# Altium PCB Amplifier.PcbDoc
Units mil, origin at the board's own origin, x right, y up, seen from the top; angles counter-clockwise.
Board outline 6000 x 4000 mil, 2 copper layers (Top Layer, Bottom Layer); 148 components, 104 nets, 411 pads, 72 vias.
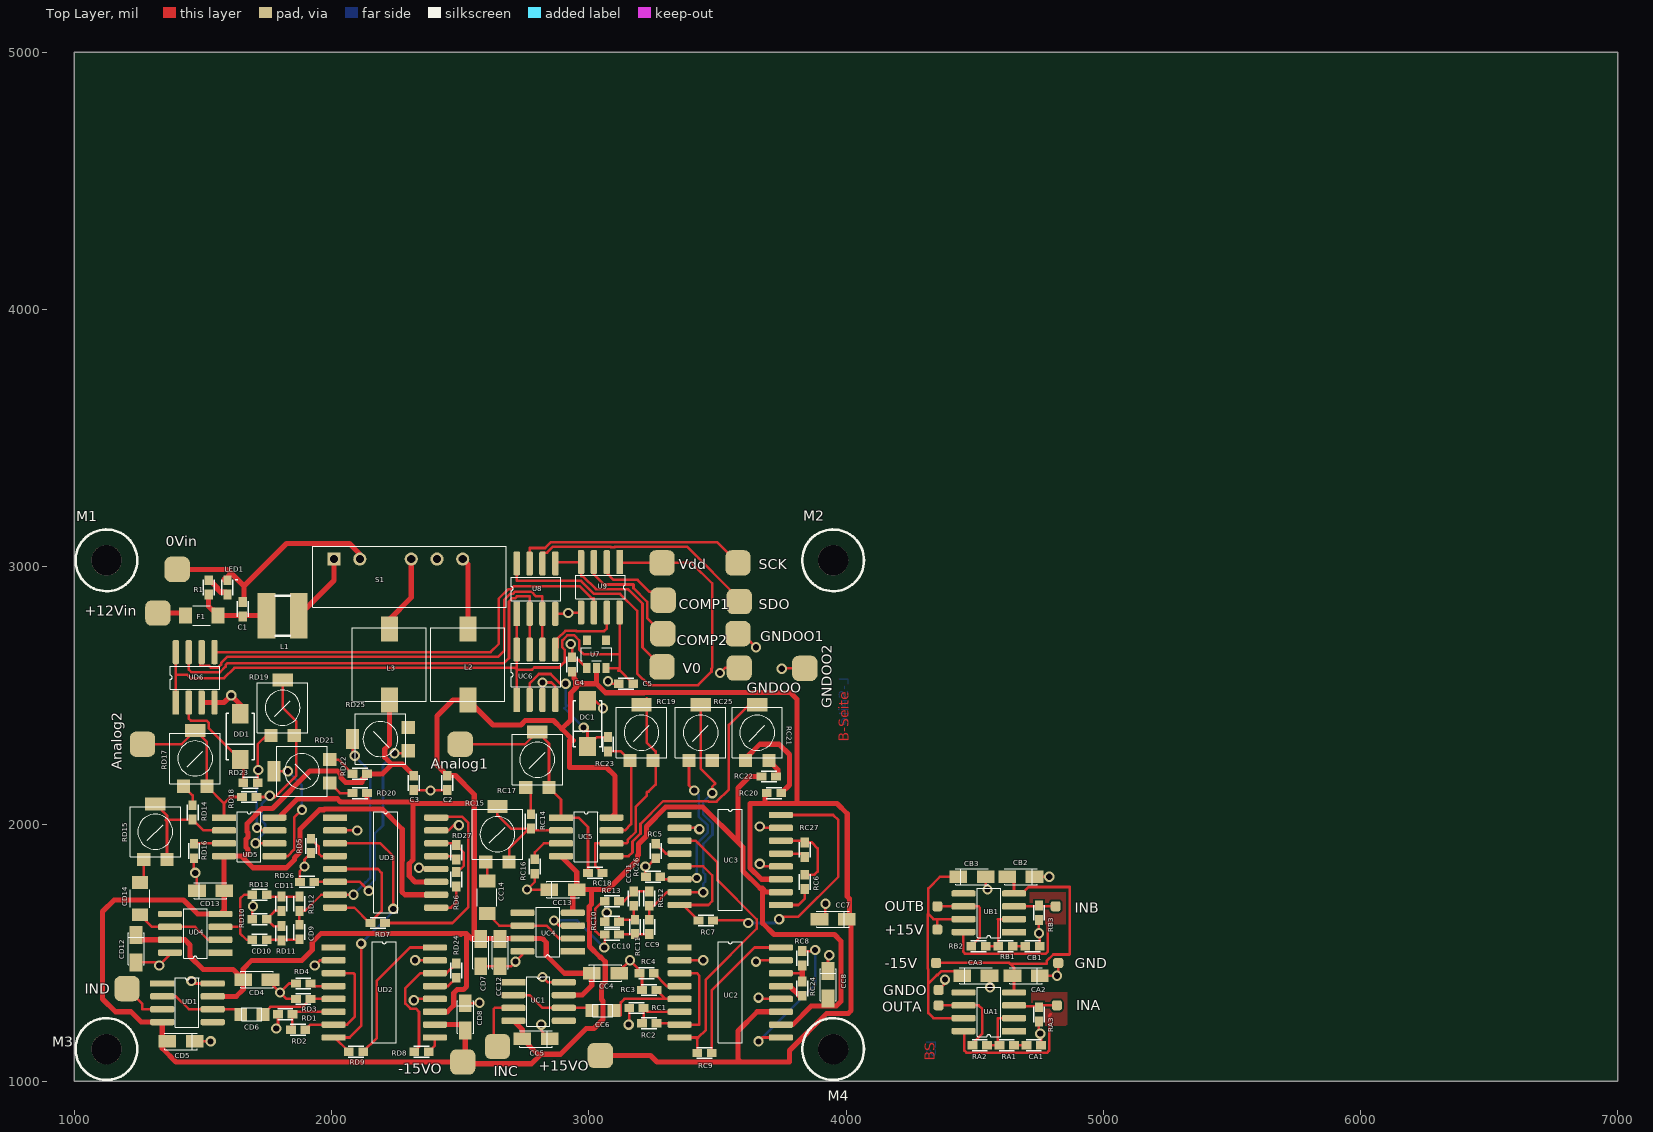
[diagram p0: Top Layer view]
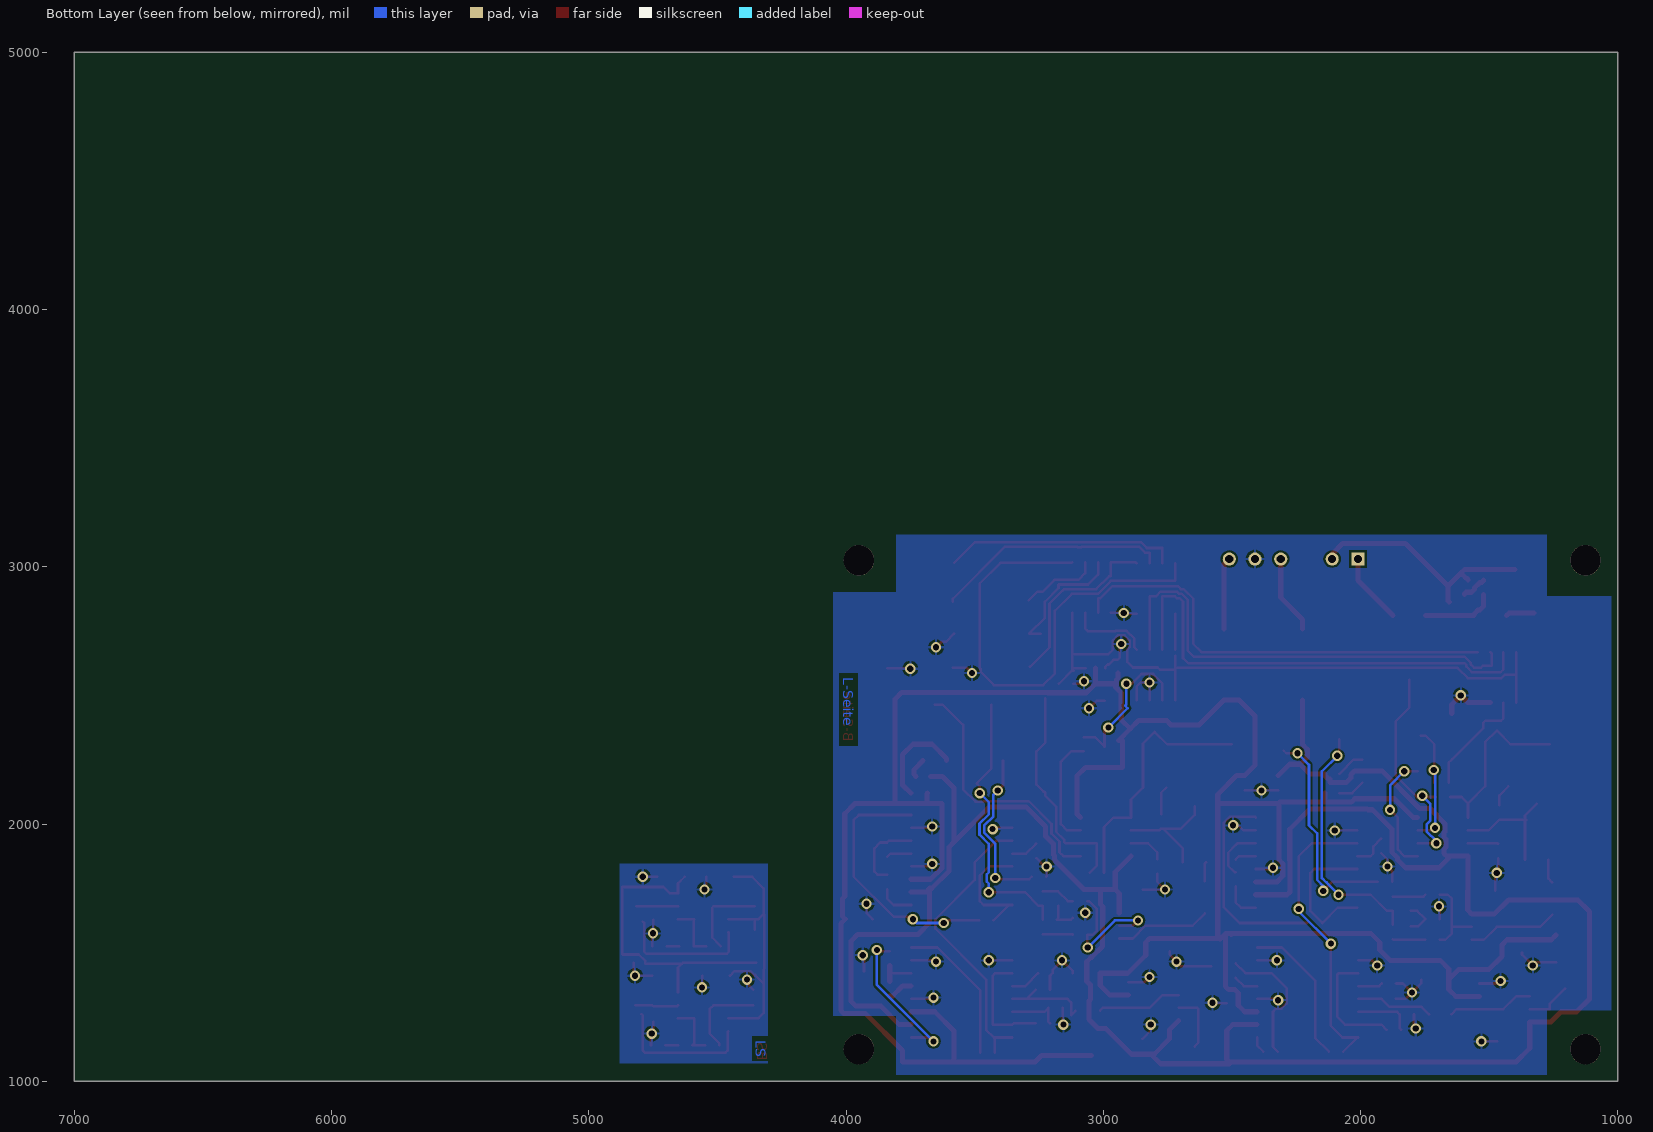
[diagram p1: Bottom Layer view, seen from below]

## Layer stack, top to bottom
Top Solder: solder mask 0.4, Solder Resist, Dk 3.5
Top Layer: signal copper 1.4
Dielectric 1: dielectric 12.6, FR-4, Dk 4.8
Bottom Layer: signal copper 1.4
Bottom Solder: solder mask 0.4, Solder Resist, Dk 3.5

## Board outline
1000,1000 7000,1000 7000,5000 1000,5000

## Design rules (kind name [scope] priority, off if disabled: settings)
Clearance [All] p1: gap=8 ignorepadtopadclearanceinfootprint=FALSE except(0: Arc-Hole Track-Hole SMDPad-Hole THPad-Hole Via-Hole Fill-Hole Poly-Hole Region-Hole Text-Hole)
HoleSize [All] p1: absolutevalues=TRUE maxlimit=500 minlimit=1 maxpercent=80.000 minpercent=20.000
MinimumSolderMaskSliver [All] p1 off: minsoldermaskwidth=10
PolygonConnect [All] p1: connectstyle=Relief reliefconductorwidth=10 reliefentries=4 polygonreliefangle="90 Angle" airgapwidth=10
RoutingVias [All] p1: holewidth=24 width=40 viastyle="Through Hole" minholewidth=24 minwidth=40 maxholewidth=28 maxwidth=50
SilkToSilkClearance [All] p1 off: silktosilkclearance=10
SilkToSolderMaskClearance [IsPad] p1 off: minsilkscreentomaskgap=10 clearancetoexposedcopper=TRUE
SolderMaskExpansion [All] p1: expansion=4
Width [All] p1: maxlimit=20 minlimit=10 preferedwidth=10
26 further rules are at their usual default settings.

## Components (designator, comment, footprint, x,y, rotation, side; value= is the part's Value field where it differs from the comment)
0Vin "SIP" PAD2,2x2,5 1400,2990 r90 top
+12Vin "SIP" PAD2,2x2,5 1325,2820 r90 top
+15V "SIP" PAD1X1 4355,1590 r180 top
+15VO "SIP" PAD2,2x2,5 3045,1100 r90 top
-15V "SIP" PAD1X1 4350,1460 r270 top
-15VO "SIP" PAD2,2x2,5 2510,1075 r90 top
Analog1 "SIP" PAD2,2x2,5 2500,2310 r90 top
Analog2 "SIP" PAD2,2x2,5 1265,2310 r270 top
C1 "1u0" 0603 1655,2835 r270 top
C2 "1u0" 0603 2450,2160 r90 top
C3 "1u0" 0603 2320,2160 r270 top
C4 "100n" 0603 2935,2620 r270 top
C5 "1u0" 0603 3145,2545 r0 top
CA1 "u47" 0603 4730,1140 r180 top
CA2 "TA2u2/25" TA_SMD-A 4700,1410 r180 top
CA3 "TA2u2/25" TA_SMD-A 4505,1410 r0 top
CB1 "u47" 0603 4725,1525 r180 top
CB2 "TA2u2/25" TA_SMD-A 4680,1795 r180 top
CB3 "TA2u2/25" TA_SMD-A 4490,1795 r0 top
CC4 "TA2u2/25" TA_SMD-A 3065,1420 r0 top
CC5 "TA2u2/25" TA_SMD-A 2795,1165 r180 top
CC6 "u82" C0805 3055,1275 r0 top
CC7 "TA2u2/25" TA_SMD-A 3950,1630 r180 top
CC8 "TA2u2/25" TA_SMD-A 3930,1375 r270 top
CC9 "500p" 0603 3235,1600 r270 top
CC10 "500p" 0603 3090,1570 r180 top
CC11 "1n" 0603 3175,1710 r90 top
CC12 "TA2u2/25" TA_SMD-A 2655,1500 r270 top
CC13 "TA2u2/25" TA_SMD-A 2900,1745 r0 top
CC14 "3u3/50V" 1206 2605,1715 r90 top
CD4 "TA2u2/25" TA_SMD-A 1710,1395 r0 top
CD5 "TA2u2/25" TA_SMD-A 1415,1155 r180 top
CD6 "u82" C0805 1690,1260 r0 top
CD7 "TA2u2/25" TA_SMD-A 2580,1500 r270 top
CD8 "TA2u2/25" TA_SMD-A 2520,1250 r270 top
CD9 "500p" 0603 1875,1580 r270 top
CD10 "500p" 0603 1720,1550 r180 top
CD11 "1n" 0603 1805,1690 r90 top
CD12 "TA2u2/25" TA_SMD-A 1240,1515 r270 top
CD13 "TA2u2/25" TA_SMD-A 1530,1740 r0 top
CD14 "3u3/50V" 1206 1255,1710 r90 top
COMP1 "SIP" PAD2,2x2,5 3289.16,2870 r90 top
COMP2 "SIP" PAD2,2x2,5 3288,2740 r90 top
DC1 "SMAJ5.0A" "SMA (DO214AC)" 2995,2390 r270 top
DD1 "SMAJ5.0A" "SMA (DO214AC)" 1645,2340 r270 top
F1 "PTCSI 0,1-1206" 1206 1495,2810 r0 top
GND "SIP" PAD1X1 4825,1460 r180 top
GNDO "SIP" PAD1X1 4360,1355 r180 top
GNDOO "SIP" PAD2,2x2,5 3585,2606.67 r90 top
GNDOO1 "SIP" PAD2,2x2,5 3580,2740 r90 top
GNDOO2 "SIP" PAD2,2x2,5 3840,2605 r90 top
INA "SIP" PAD1X1 4820,1295 r180 top
INB "SIP" PAD1X1 4815,1680 r180 top
INC "SIP" PAD2,2x2,5 2645,1135 r90 top
IND "SIP" PAD2,2x2,5 1205,1360 r90 top
L1 "744773147" WE-4045 1810,2810 r270 top
L2 "744778233" "WE-PD S/M/XS" 2530,2620 r0 top
L3 "744778233" "WE-PD S/M/XS" 2225,2620 r0 top
LED1 "LED 0603 gn" 0603-Diode 1595.17,2920 r270 top
M1 "MThole" MTHoleM3 1125,3025 r0 top value=Loch
M2 "MThole" MTHoleM3 3950,3025 r0 top value=Loch
M3 "MThole" MTHoleM3 1125,1125 r0 top value=Loch
M4 "MThole" MTHoleM3 3950,1125 r0 top value=Loch
OUTA "SIP" PAD1X1 4360,1295 r180 top
OUTB "SIP" PAD1X1 4355,1680 r180 top
R1 "2k0" 0603 1522.37,2920 r270 top
RA1 "2k0" 0603 4625,1140 r180 top
RA2 "18k" 0603 4520,1140 r180 top
RA3 "100M" 0603 4750,1260 r90 top
RB1 "2k0" 0603 4620,1525 r180 top
RB2 "18k" 0603 4515,1525 r180 top
RB3 "100M" 0603 4750,1655 r90 top
RC1 "4k7" 0603 3185,1285 r0 top
RC2 "18k" 0603 3235,1225 r180 top
RC3 "100k" 0603 3235,1355 r0 top
RC4 "82l" 0603 3225,1420 r0 top
RC5 "82k" 0603 3260,1895 r90 top
RC6 "160k" 0603 3840,1775 r90 top
RC7 "160k" 0603 3455,1625 r0 top
RC8 "6k2" 0603 3830,1478 r270 top
RC9 "6k2" 0603 3450,1110 r0 top
RC10 "10" 0603 3090,1620 r0 top
RC11 "3.16M" 0603 3180,1600 r90 top
RC12 "6.37M" 0603 3235,1710 r270 top
RC13 "6.37M" 0603 3090,1700 r0 top
RC14 "100" 0603 2775,2010 r270 top
RC15 "TS53YL-2k" TS53YL 2645,1960 r0 top
RC16 "10k" 0603 2790,1835 r90 top
RC17 "TS53YL-50k" TS53YL 2800,2250 r0 top
RC18 "10k" 0603 3025,1810 r0 top
RC19 "TS53YL-5k" TS53YL 3205,2355 r0 top
RC20 "3k9" 0603 3720,2120 r0 top
RC21 "TS53YL-1k" TS53YL 3655,2355 r0 top
RC22 "4k7" 0603 3700,2185 r180 top
RC23 "10k" 0603 3075,2310 r90 top
RC24 "5k6" 0603 3830,1360 r270 top
RC25 "TS53YL-22k" TS53YL 3435,2355 r0 top
RC26 "2k2" 0603 3250,1795 r0 top
RC27 "5k6" 0603 3840,1900 r270 top
RD1 "4k7" 0603 1820,1260 r0 top
RD2 "18k" 0603 1870,1200 r180 top
RD3 "100k" 0603 1890,1320 r0 top
RD4 "82k" 0603 1890,1380 r0 top
RD5 "82k" 0603 1920,1915 r90 top
RD6 "160k" 0603 2485,1785 r90 top
RD7 "160k" 0603 2180,1615 r0 top
RD8 "6k2" 0603 2350,1115 r180 top
RD9 "6k2" 0603 2095,1115 r0 top
RD10 "10" 0603 1720,1630 r0 top
RD11 "3.16M" 0603 1805,1575 r90 top
RD12 "6.37M" 0603 1875,1690 r270 top
RD13 "6.37M" 0603 1720,1725 r0 top
RD14 "100" 0603 1460,2045 r270 top
RD15 "TS53YL-2k" TS53YL 1315,1970 r0 top
RD16 "10k" 0603 1465,1895 r90 top
RD17 "TS53YL-50k" TS53YL 1470,2255 r0 top
RD18 "10k" 0603 1680,2105 r0 top
RD19 "TS53YL-5k" TS53YL 1810,2452.01 r0 top
RD20 "3k9" 0603 2110,2120 r180 top
RD21 "TS53YL-1k" TS53YL 1885,2205 r90 top
RD22 "4k7" 0603 2110,2195 r0 top
RD23 "10k" 0603 1685,2160 r180 top
RD24 "5k6" 0603 2485,1430 r270 top
RD25 "TS53YL-22k" TS53YL 2190,2330 r90 top
RD26 "2k2" 0603 1905,1775 r0 top
RD27 "5k6" 0603 2485,1890 r270 top
S1 "DC/DC-Wandler" "DC/DC 2W Dual" 2010,3030 r0 top value=SW2-
SCK "SIP" PAD2,2x2,5 3580,3015 r90 top
SDO "SIP" PAD2,2x2,5 3585,2865 r90 top
U7 "TLV70450" SOT23/5 3030,2660 r0 top
U8 "ADuM1201CRZ" SO8 2795,2915 r0 top
U9 "ADuM1200CRZ" SO8 3045,2920 r180 top
UA1 "OPA124U" SO8 4555,1270 r90 top
UB1 "OPA124U" SO8 4555,1655 r90 top
UC1 "OPA124U" SO8 2805,1310 r270 top
UC2 "UAF42" SO16W 3550,1345 r270 top
UC3 "UAF42" SO16W 3550,1860 r270 top
UC4 "OPA124U" SO8 2840,1580 r90 top
UC5 "OPA2277" SO8 2990,1950 r270 top value=OPA2277UA
UC6 "LTC1864" SO8 2795,2580 r0 top
UD1 "OPA124U" SO8 1440,1305 r270 top
UD2 "UAF42" SO16W 2205,1345 r270 top
UD3 "UAF42" SO16W 2210,1850 r270 top
UD4 "OPA124U" SO8 1470,1575 r90 top
UD5 "OPA2277" SO8 1680,1950 r270 top value=OPA2277UA
UD6 "LTC1864" SO8 1470,2570 r0 top
V0 "SIP" PAD2,2x2,5 3285,2610.98 r90 top
Vdd "SIP" PAD2,2x2,5 3285,3015 r90 top

## Footprints (in the part's own frame and the unit in brackets; to place one, negate y for a bottom-side part, rotate by r counter-clockwise, add the part's x,y. Pads: shape width x height; smd on the part's side, far side on the other; paste and mask are expansions set on the pad)
0603 [mil]
  rect 38x32 smd: 1(-28,0) 2(28,0)
  silkscreen extent -30,-21 30,21, body extent -30,-16 30,16
0603-Diode [mil]
  rect 38x32 smd: A(28,0) K(-28,0)
  silkscreen extent -30,-21 30,40, body extent -30,-16 30,16
1206 [mm] "generisch 1206"
  rect 1.27x1.6 smd: 1(-1.6,0) 2(1.6,0)
  silkscreen extent -0.89,-0.97 0.86,0.97, body extent -1.6,-0.89 1.6,0.91, height 1.05
C0805 [mil] "Kondensator 0805"
  rect 50x50 smd: 1(-43,0) 2(43,0)
  silkscreen extent -39,-25 39,25, body extent -39,-25 39,25, height 41
"DC/DC 2W Dual" [mm] "Wandlermodul"
  round 1.3 hole 0.8: COM(10.16,0) IM(2.54,0) OM(7.62,0) OP(12.7,0)
  rect 1.3x1.3 hole 0.8: IP(0,0)
  silkscreen extent -2.13,-4.75 17,1.25, body extent -2.13,-4.75 17,1.25, height 9.5
MTHoleM3 [mm] "Befestigungsloch M3-Schraube"
  round 3 hole 3 unplated: 1(0,0)
  silkscreen extent -3.04,-3.05 3.05,3.05, body extent -3.05,-3.05 3.05,3.05
PAD1X1 [mm] "Kupferfläche"
  rrect50% 1x1 smd: 1(0,0)
PAD2,2x2,5 [mm] "Kupferfläche"
  rrect50% 2.5x2.5 smd: 1(0,0)
"SMA (DO214AC)" [mm] "DO214"
  rect 1.9x1.64 smd: A(-2.26,0) K(2.26,0)
  silkscreen extent -2.29,-1.4 2.29,1.4, body extent -2.29,-1.4 2.29,1.4
SO8 [mil] "SO8 normal breit"
  rect 25x94.02 smd: 1(-75,-97.99)
  rrect50% 25x94.02 smd: 2(-25,-97.99) 3(25,-97.99) 4(75,-97.99) 5(75,97.99) 6(25,97.99) 7(-25,97.99) 8(-75,97.99)
  silkscreen extent -97,-47 96,44, body extent -98,-79 98,79, height 41
SO16W [mm] "SO16 wide"
  rect 0.635x2.388 smd: 1(-4.445,-5)
  rrect50% 0.635x2.388 smd: 2(-3.175,-5) 3(-1.905,-5) 4(-0.635,-5) 5(0.635,-5) 6(1.905,-5) 7(3.175,-5) 8(4.445,-5) 9(4.445,5) 10(3.175,5) 11(1.905,5) 12(0.635,5) 13(-0.635,5) 14(-1.905,5) 15(-3.175,5) 16(-4.445,5)
  silkscreen extent -5.03,-1.17 4.95,1.19, body extent -5.21,-3.81 5.21,3.81, height 1.05
SOT23/5 [mm] "SOT23 = TO-236AB"
  rect 0.711x0.965 smd: 1(-0.953,-1.372) 2(0,-1.372) 3(0.953,-1.372)
  rect 0.787x0.965 smd: 4(0.953,1.372) 5(-0.953,1.372)
  silkscreen extent -1.52,-0.64 1.52,0.64, body extent -1.52,-0.64 1.52,0.64, height 1.05
TA_SMD-A [mm] "3216"
  rect 1.75x1.25 smd: A(-1.35,0) C(1.35,0)
  silkscreen extent -1.6,-0.79 1.6,0.81, body extent -1.6,-0.8 1.6,0.8, height 1.6
TS53YL [mm] "SMD-Cermet-Trimmer Vishay Serie TS53YL"
  rect 1.3x1.3 smd: 1(-1.15,-2.75) 2(1.15,-2.75)
  rect 2x1.3 smd: 3(0,2.75)
  silkscreen extent -2.49,-2.49 2.49,2.49, body extent -2.49,-2.49 2.49,2.49, height 1.05
WE-4045 [mm] "PD2"
  rect 4.5x1.75 smd: 1(0,-1.6) 2(0,1.6)
  silkscreen extent -1.98,-0.66 2.01,0.69, body extent -2,-2.25 2,2.25, height 3.2
"WE-PD S/M/XS" [mm] "Bauformen 6050,7332,7345"
  rect 1.7x2.5 smd: 1(0,3.5) 2(0,-3.5)
  silkscreen extent -3.66,-3.63 3.63,3.63, body extent -3.65,-3.65 3.65,3.65, height 10.1

## Part data
0Vin +12Vin +15V +15VO -15V -15VO Analog1 Analog2 COMP1 COMP2 GND GNDO GNDOO GNDOO1 GNDOO2 INA INB INC IND OUTA OUTB SCK SDO V0 Vdd: library part SIP1, "2-pol. Leiste"
C1 C2 C3 C4 C5 CA1 CB1 CC6 CC9 CC10 CC11 CC14 CD6 CD9 CD10 CD11 CD14: library part Capacitor, "Capacitor"
CA2 CA3 CB2 CB3 CC4 CC5 CC7 CC8 CC12 CC13 CD4 CD5 CD7 CD8 CD12 CD13: library part Elko, "Elko"
DC1 DD1: library part "DIODE TRANSIL", "DIODE TRANSIL"
F1: library part Multifuse, "Multifuse"
L1 L2 L3: library part Inductor, "Inductor"
LED1: library part LED, "Typical RED, GREEN, YELLOW, AMBER GaAs LED", PackageDocument=Feb-2002, LatestRevisionDate=17-Jul-2002, LatestRevisionNote="Re-released for DXP Platform.", PackageReference=3.2X1.6X1.1, Published=8-Jun-2000, Publisher="Altium Limited"
M1 M2 M3 M4: library part MTHoleM3, "Befestigungsloch M3"
R1 RA1 RA2 RA3 RB1 RB2 RB3 RC1 RC2 RC3 RC4 RC5 RC6 RC7 RC8 RC9 RC10 RC11 RC12 RC13 RC14 RC16 RC18 RC20 RC22 RC23 RC24 RC26 RC27 RD1 RD2 RD3 RD4 RD5 RD6 RD7 RD8 RD9 RD10 RD11 RD12 RD13 RD14 RD16 RD18 RD20 RD22 RD23 RD24 RD26 RD27: library part Resistor, "Resistor"
RC15 RC17 RC19 RC21 RC25 RD15 RD17 RD19 RD21 RD25: library part Trimmer, "Trimmer"
S1: library part "DC/DC dual", "DC/DC-Wandler Dual output"
U7: library part TLV704xx, "VReg GND-IN_OUT"
U8: library part ADuM1201/3211
U9: library part ADuM1200
UA1 UB1 UC1 UC4 UD1 UD4: "Single General-Purpose, Low-Voltage Rail-to-Rail Output Operational Amplifier"
UC5 UD5: library part LTC6244, "Single General-Purpose, Low-Voltage Rail-to-Rail Output Operational Amplifier"

## Via types
v1: diameter 40, hole 24, Top Layer to Bottom Layer, tented both sides, 56 vias
v2: diameter 40, hole 24, Top Layer to Bottom Layer, 16 vias

## Nets (pads, with @x,y where several pads share a name; then routed paths per layer and width w, separated by ;. In a path a pad name is that pad's centre, name@x,y a point inside that pad or via, vN(x,y) a via of type N, cw(c..) or ccw(c..) an arc to the next point about the centre after c; other vN are vias at no path point)
+15V: +15VO.1 C2.2 C4.2 CC4.A CC7.A CC12.A CD4.A CD7.A CD12.A L2.2 RC20.1 RD20.1 U7.2 UC1.7 UC2.11 UC3.11 UC4.7 UC5.8 UD1.7 UD2.11 UD3.11 UD4.7 UD5.8 | length 10741.9
  Top Layer w20: CD12.A 1258.15,1550 UD4.7 1430,1550 1450,1530 1450,1485 1500,1435 1616.85,1435 CD4.A ; UD1.7 1630,1330 1656.85,1356.85 CD4.A ; UD5.8 1795,2025 1868,2098 2022.47,2098 2034.47,2086 2314,2086 2320,2080 ; 2138,2088 RD20.1 ; UD2.11 2450,1270 2475,1295 2475,1342.66 2488.7,1356.36 2513.64,1356.36 2525,1367.71 2525,1573.15 ; UD3.11 2325,1775 2302,1798 2302,1845.74 2317,1860.74 2317,2077 2320,2080 ; 2502.39,1571.68 2499.07,1575 ; 2540,2080 2320,2080 ; UC1.7 2975,1335 3011.85,1371.85 CC4.A 2905,1420 2835,1490 2835,1540 2820,1555 UC4.7 2546.85,1555 ; C4.2@2942,2587 2942,2566.74 2948,2560.74 2948,2540.74 ; U7.2 3030,2545 ; +15VO.1 3240,1100 3265,1075 3590,1075 ; UC5.8 3102.21,2039.22 3102.21,2187.25 3069.47,2220 2925,2220 2925,2325 2940,2325 2895,2370 ; RC20.1@3683,2120 3685,2118 3685,2080.14 ; UC2.11 3655,1270 3580,1195 3580,1085 3590,1075 ; UC3.11 3671.26,1785 3627,1829.26 3627,2080.14 3685,2080.14 ; CD4.A 1656.85,1436.85 1690,1470 1885,1470 1925,1510 1925,1540 1960,1575 2499.07,1575 ; 2499.07,1575 2523.15,1575 2525,1573.15 ; 2525,1573.15 2545,1553.15 2546.85,1555 ; 2546.85,1555 2555,1563.15 2555,2115 2482,2188 C2.2 2410,2228 2410,2420 2472.2,2482.2 L2.2 2627.2,2385 2736.32,2385 2753.17,2401.86 2863.14,2401.86 2895,2370 ; 2895,2370 2929.72,2404.72 2929.72,2509.73 2954.36,2534.38 2948,2540.74 ; 2948,2540.74 2952.26,2545 3030,2545 ; 3030,2545 3065,2510 3214.76,2510 3215.75,2510.99 3784.01,2510.99 3810,2485 3810,2080.14 ; 3590,1075 3780,1075 3780,1119 3925,1264 4009,1264 4020,1275 4020,1613.15 CC7.A 4013,1639.85 4013,1710.74 4005,1718.74 4005,2040 3964.86,2080.14 3810,2080.14 ; 3685,2080.14 3810,2080.14
-15V: -15VO.1 C3.1 CC5.C CC8.C CC13.C CD5.C CD8.C CD13.C L3.2 RC22.2 RD22.2 UC1.4 UC2.10 UC3.10 UC4.4 UC5.4 UD1.4 UD2.10 UD3.10 UD4.4 UD5.4 | length 9479.5
  Top Layer w20: L3.2 2225,2308.74 2207,2290.74 2207,2259.26 2234.06,2232.2 2235,2232.2 ; C3.1 2275.8,2232.2 2235,2232.2 ; UD2.10 2496.85,1220 CD8.C 2520,1085 -15VO.1 ; UD3.10 2285,1725 2274,1736 2274,1857.34 2275,1858.34 2275,1980 2197,2058 1973,2058 1970.5,2055.5 1952.97,2055.5 1878,1980.53 1878,1890.47 1856,1868.47 1856,1861 1825,1830 1695,1830 1650,1875 ; UC1.4 2741.85,1200.16 CC5.C 2801.85,1105 2815,1105 ; UC5.4 2953.15,1813.86 CC13.C ; UC4.4 2937.99,1729.84 CC13.C ; RC22.2 3625,2185 3580,2140 3580,1930 ; UC2.10 3793.15,1220 3865.15,1292 3962,1292 3980,1310 3980,1545 3955,1570 3720,1570 3676,1614 3676,1749 3675,1750 ; UC3.10 3690,1735 3675,1750 ; 1650,1875 UD5.4 1582.01,1741.14 CD13.C 1583.15,1665.16 UD4.4 1480,1650 1425,1705 1155,1705 1110,1660 1110,1320 1160,1270 1220,1270 1260,1230 UD1.4 1342.01,1127.99 1395,1075 -15VO.1 ; 1650,1875 1665,1875 1675,1885 1675,1901.26 1667,1909.26 1667,1940.74 1675,1948.74 1675,1966.26 1672,1969.26 1672,2002 1730,2060 1770,2060 1916.69,2206.69 2022.94,2206.69 2036.86,2192.77 2036.86,2179.69 2055.54,2161 2119,2161 2119,2175 2125,2175 2138,2188 RD22.2 2197.8,2195 2235,2232.2 ; -15VO.1 2510,1067.79 2777.79,1067.79 2815,1105 ; 2815,1105 2890,1105 2990,1205 3020,1205 3055,1240 3055,1312.46 3050,1317.46 3050,1373.64 3064.3,1387.94 3064.3,1464.3 3046.6,1482 3044.26,1482 3003,1523.26 3003,1621.29 3002,1622.29 3002,1679.53 3010,1687.53 3010,1740 3005,1745 ; CC13.C 3005,1745 ; 3005,1745 3075,1745 3190,1860 3190,1877.47 3193,1880.47 3193,1921.91 3224,1952.91 3224,1990.81 3298.69,2065.5 3444.5,2065.5 3580,1930 ; 3580,1930 3599,1911 3599,1817.66 3666.66,1750 3675,1750
GND: C2.1 C3.2 C4.1 C5.1 CC4.C CC5.A CC7.C CC8.A CC12.C CC13.A CD4.C CD5.A CD7.C CD8.A CD12.C CD13.A DC1.A DD1.A GNDOO1.1 GNDOO2.1 GNDOO.1 RC1.1 RC3.1 RC4.1 RC5.1 RC10.1 RC16.1 RC26.1 RD1.1 RD3.1 RD4.1 RD5.1 RD10.1 RD16.1 RD26.1 S1.COM U7.1 U8.4 U9.5 UC1.8 UC2.2 UC2.12 UC2.15 UC3.2 UC3.12 UC3.15 UC4.8 UC6.3 UC6.4 UD1.8 UD2.2 UD2.12 UD2.15 UD3.2 UD3.12 UD3.15 UD4.8 UD6.3 UD6.4 | length 4150.3
  Top Layer w10: CD12.C 1318.15,1461.85 v1(1330,1450) 1372.01,1492.01 UD4.8 ; v1(1455,1390) 1465,1380 UD1.8 ; RD16.1 1465,1815 v1(1470,1810) 1476.85,1803.15 CD13.A ; CD5.A v1(1530,1155) ; RD10.1 1692,1677 v1(1695,1680) ; CD4.C 1763.15,1381.85 v1(1800,1345) ; v2(1785,1205) 1792,1212 RD1.1 ; RD3.1 1825,1320 v1(1800,1345) ; RD4.1 1835,1380 v1(1800,1345) ; RD26.1 1877,1817 v2(1895,1835) 1895,1862 RD5.1 ; v1(1935,1450) 1955,1470 UD2.2 ; UD3.2 v1(2100,1975) ; v1(2320,1315) 2325,1320 UD2.12 ; C3.2 2383,2132 v1(2385,2130) 2387,2132 C2.1 ; v1(2325,1470) UD2.15 ; v1(2340,1830) 2345,1825 UD3.12 ; UD3.15 2455,1975 2475,1995 v1(2495,1995) ; CD8.A 2573.15,1303.15 v1(2575,1305) ; CD7.C CC12.C 2696.85,1446.85 v1(2715,1465) 2742.01,1492.01 UC4.8 ; RC16.1 2790,1775 v1(2760,1745) CC13.A ; v1(2815,1220) 2815,1198.15 CC5.A ; v1(2820,1405) 2840,1385 UC1.8 ; UC6.3 v1(2820,2550) 2855,2550 2870,2535 UC6.4 ; U8.4 2917.01,2817.01 v1(2920,2820) 2922.01,2822.01 U9.5 ; v1(2930,2700) 2935,2695 C4.1 2944.68,2638.32 2960.14,2638.32 2978.48,2619.98 2983.48,2619.98 2992.48,2610.98 U7.1 ; DC1.A 3026.02,2478.98 v1(3055,2450) ; RC10.1@3062,1635 3062,1652 3065,1655 v1(3070,1655) ; v1(3075,2555) 3085,2545 C5.1 ; CC4.C 3118.15,1428.15 v1(3160,1470) 3197,1433 RC4.1 3207,1410 RC3.1 ; v2(3155,1220) 3157,1222 RC1.1 ; RC26.1 3220,1797 v1(3220,1835) 3228,1835 RC5.1 ; UC2.2 v1(3445,1470) ; UC3.2 3425,1985 v1(3430,1980) ; v1(3510,2586.67) 3530,2606.67 GNDOO.1 ; GNDOO1.1 3612.11,2707.89 3629.1,2707.89 v2(3650,2686.99) ; v1(3650,1465) 3655,1470 UC2.15 ; v1(3660,1325) 3665,1320 UC2.12 ; v1(3665,1845) 3675,1835 UC3.12 ; v1(3665,1990) 3670,1985 UC3.15 ; v2(3750,2603.67) 3751.33,2605 GNDOO2.1 ; CC7.C 3920,1653.15 v1(3920,1690) ; CC8.A 3930,1485 v2(3935,1490)
  Top Layer w20: UD6.3 UD6.4 1582.01,2472.01 v1(1610,2500) 1645,2465 DD1.A
GUARD1: UA1.8 | length 558.2
  Top Layer w10: UA1.8 4460,1192.01 4460,1118.62 4467.62,1111 4474,1111 4475,1110 4781.38,1110 4790,1118.62 4790,1255 4795,1260
GUARD2: UB1.8 | length 532.8
  Top Layer w10: UB1.8 4455,1577.99 4455,1503.62 4462.62,1496 4464,1496 4465,1495 4776.38,1495 4785,1503.62 4785,1615 4790,1620
Net0Vin_1: 0Vin.1 C1.1 LED1.K S1.IM | length 949.8
  Top Layer w20: 0Vin.1 1595,2990 1609.5,2975.5 1615,2970 ; LED1.K@1582,2948 1582,2951 1588,2957 1591,2957 1604,2970 1615,2970 ; C1.1 1660,2868 1660,2925 ; S1.IM 2110,3050 2070,3090 1825,3090 1660,2925 ; 1615,2970 1660,2925
Net+12Vin_1: +12Vin.1 F1.1 | length 111.2
  Top Layer w20: +12Vin.1 1422.01,2820 F1.1
Net+15V_1: +15V.1 CA3.A CB3.A UA1.7 UB1.7 | length 1112.5
  Top Layer w10: +15V.1 4355,1630 ; CB3.A 4365,1795 4320,1750 4320,1650 ; CA3.A 4433.85,1428 4371.33,1428 4356.33,1413 4353,1413 4320,1380 ; UA1.7 4340,1245 4320,1265 4320,1380 ; UB1.7 4355,1630 ; 4320,1380 4320,1435.33 4317.31,1438.01 4317.31,1647.31 4320,1650 ; 4320,1650 4340,1630 4355,1630
Net-15V_1: -15V.1 CA2.C CB2.C UA1.4 UB1.4 | length 1224.2
  Top Layer w10: -15V.1 4635,1460 4637.69,1457.31 ; CB2.C 4652.99,1768.86 UB1.4 4685,1730 4710,1755 4870,1755 4870,1495 4867.69,1492.69 4805.7,1492.69 4780,1466.99 4780,1457.31 4637.69,1457.31 ; UA1.4 4652.99,1442.01 4637.69,1457.31
NetAnalog1_1: Analog1.1 RC17.2 RC17.3 RC18.1 UC5.1 | length 989.7
  Top Layer w10: Analog1.1 2751.73,2310 RC17.3 2845.28,2312.99 RC17.2 2892.01,2095 UC5.1 2960,2025 2997,1988 RC18.1
NetAnalog2_1: Analog2.1 RD17.2 RD17.3 RD18.1 UD5.1 | length 692.1
  Top Layer w10: Analog2.1 1416.73,2310 RD17.3 1515.28,2317.99 RD17.2 1582.01,2080 ; UD5.1 1582.01,2080 ; RD18.1 1607.01,2105 1582.01,2080
NetC1_2: C1.2 F1.2 L1.1 R1.2 | length 289.6
  Top Layer w20: R1.2 1522.37,2845.62 1536.5,2831.5 1542.99,2831.5 1557.99,2816.5 F1.2 L1.1
NetC5_2: C5.2 U7.3 U8.1 U9.8 UC6.1 UC6.8 UD6.1 UD6.8 | length 2784.8
  Top Layer w10: UD6.1 1395,2580 ; UD6.8 1395,2580 ; UC6.1 2720,2600 ; UC6.8@2720,2652.99 2720,2600 ; UC6.8 U8.1 ; U7.3 3112.02,2605.98 3119,2599 ; 3115,2595 3119,2599 ; U9.8 3120,2660 ; C5.2 3119,2599 ; 1395,2580 1439.54,2580 1452.54,2567 1582,2567 1622.17,2607.17 2712.83,2607.17 2720,2600 ; 2720,2600 2780,2600 2788.26,2608.26 2885,2608.26 2906,2629.26 2906,2677.33 2897,2686.33 2897,2713.67 2916.33,2733 2943.67,2733 2963,2713.67 2963,2677 2980,2660 3120,2660 ; 3119,2599 3120,2600 3120,2660
NetCA1_1: CA1.1 CA2.A CA3.C CB1.1 CB2.A CB3.C GND.1 GNDO.1 RA3.1 RB3.1 | length 523.3
  Top Layer w10: GNDO.1 4385,1380 v1(4385,1395) ; CB3.C 4543.15,1751.85 v1(4550,1745) ; CA3.C 4558.15,1366.85 v1(4560,1365) ; CB2.A v1(4790,1795) ; RA3.1 4750,1190 v1(4755,1185) 4758,1182 CA1.1 ; RB3.1 v1(4750,1575) 4753,1572 CB1.1 ; CA2.A v1(4820,1410) 4825,1415 GND.1
NetCA1_2: CA1.2 RA1.1 | length 49
  Top Layer w10: RA1.1 CA1.2
NetCB1_2: CB1.2 RB1.1 | length 49
  Top Layer w10: RB1.1 CB1.2
NetCC6_1: CC6.1 UC1.2 UC1.6 | length 329.8
  Top Layer w10: UC1.2 2770,1335 2820,1285 UC1.6 3002,1285 CC6.1
NetCC6_2: CC6.2 RC3.2 UC2.5 | length 357.7
  Top Layer w10: CC6.2@3108,1273 3125,1256 3125,1306.38 3138.62,1320 3298,1320 ; RC3.2 3298,1320 ; UC2.5 3298,1320
NetCC9_1: CC9.1 RC12.2 RC25.3 UC3.7 | length 1094.2
  Top Layer w10: CC9.1 RC12.2 3252,1682 3305,1735 UC3.7 v2(3445,1735) ; RC25.3 3435,2215 3492.5,2157.5 3480,2145 v2(3480,2120)
  Bottom Layer w10: v2(3445,1735) 3445,1768.33 3453,1776.33 3453,1803.67 3445,1811.67 3445,1922.88 3481,1958.88 3481,2001.12 3445,2037.12 3445,2085 v2(3480,2120)
NetCC9_2: CC9.2 CC10.1 RC11.1 | length 117.8
  Top Layer w10: CC10.1 3120,1572 RC11.1 CC9.2
NetCC10_2: CC10.2 RC13.1 UC4.3 | length 547.4
  Top Layer w10: v1(2865,1625) 2885,1605 UC4.3 ; v1(3060,1520) 3062,1522 CC10.2 3040,1570 3026,1584 3026,1671 3055,1700 RC13.1
  Bottom Layer w10: v1(2865,1625) 2955,1625 v1(3060,1520)
NetCC11_1: CC11.1 RC10.2 RC11.2 | length 121
  Top Layer w10: RC10.2@3118,1635 3125,1628 RC11.2 3175,1633 CC11.1
NetCC11_2: CC11.2 RC12.1 RC13.2 | length 132.7
  Top Layer w10: RC13.2 3137,1700 CC11.2 RC12.1
NetCC14_1: CC14.1 UC4.2 UC4.6 | length 373.2
  Top Layer w10: CC14.1 2652.01,1605 UC4.6 2835,1605 2885,1555 UC4.2
NetCC14_2: CC14.2 RC15.1 | length 75.9
  Top Layer w10: RC15.1 2605,1846.46 CC14.2
NetCD6_1: CD6.1 UD1.2 UD1.6 | length 334
  Top Layer w10: UD1.2 1395,1330 1445,1280 UD1.6 1627,1280 CD6.1
NetCD6_2: CD6.2 RD3.2 UD2.5 | length 300
  Top Layer w10: CD6.2 1762,1289 1887,1289 RD3.2 UD2.5
NetCD9_1: CD9.1 RD12.2 RD25.3 UD3.7 | length 951.3
  Top Layer w10: CD9.1 RD12.2 1897,1662 1960,1725 UD3.7 v2(2085,1725) ; RD25.3 2081.73,2273.27 v2(2090,2265)
  Bottom Layer w10: v2(2085,1725) 2085,1726.67 2131.33,1773 2133,1773 2150,1790 2150,2205 v2(2090,2265)
NetCD9_2: CD9.2 CD10.1 RD11.1 | length 127.8
  Top Layer w10: CD10.1 1873,1550 CD9.2
NetCD10_2: CD10.2 RD13.1 UD4.3 | length 322.6
  Top Layer w10: UD4.3 1645,1600 ; CD10.2 1670,1550 1645,1575 1645,1600 ; RD13.1 1660,1725 1645,1710 1645,1600
NetCD11_1: CD11.1 RD10.2 RD11.2 | length 138.4
  Top Layer w10: RD11.2 1775,1603 RD10.2 1780,1662 CD11.1
NetCD11_2: CD11.2 RD12.1 RD13.2 | length 129.9
  Top Layer w10: RD13.2 1755,1718 CD11.2 RD12.1
NetCD14_1: CD14.1 UD4.2 UD4.6 | length 353.2
  Top Layer w10: CD14.1 1302.01,1600 UD4.6 1470,1600 1520,1550 UD4.2
NetCD14_2: CD14.2 RD15.1 | length 94.8
  Top Layer w10: CD14.2 1269.72,1787.72 RD15.1
NetCOMP1_1: COMP1.1 U9.2 | length 305.6
  Top Layer w10: U9.2 3070,2975 3096,2949 3190,2949 3236.89,2902.11 3257.05,2902.11 COMP1.1
NetCOMP2_1: COMP2.1 U9.3 | length 501.4
  Top Layer w10: U9.3 3020,2970 3059,2931 3174,2931 3174,2916.91 3226.95,2863.97 3226.95,2801.05 COMP2.1 COMP2.1@3243,2740
NetDC1_K: DC1.K RC23.2 UC6.2 | length 627
  Top Layer w10: UC6.2 2770,2546.67 2806.33,2583 2852,2583 2890,2545 v1(2910,2545) ; v1(2980,2375) 2995,2375 DC1.K 3031.98,2338 RC23.2
  Bottom Layer w10: v1(2910,2545) 2910,2465 2915,2460 2905,2450 v1(2980,2375)
NetDD1_K: DD1.K RD23.2 UD6.2 | length 435.9
  Top Layer w10: UD6.2 1445,2410 1453.14,2401.86 1514.75,2401.86 1522.37,2394.24 1522.37,2373.65 DD1.K 1657,2239.02 RD23.2
NetINA_1: INA.1 RA3.2 UA1.3 | length 169.5
  Top Layer w10: UA1.3 4655.99,1292 4750,1292 4753,1295 INA.1
NetINB_1: INB.1 RB3.2 UB1.3 | length 162
  Top Layer w10: UB1.3 INB.1
NetINC_1: INC.1 UC1.3 | length 230.3
  Top Layer w10: INC.1 2630,1150 2630,1280 2635,1285 UC1.3
NetIND_1: IND.1 UD1.3 | length 181.9
  Top Layer w10: IND.1 1265,1300 1265,1280 UD1.3
NetL1_2: L1.2 S1.IP | length 276.8
  Top Layer w20: L1.2 2010,2947.01 S1.IP
NetL2_1: L2.1 S1.OP | length 280.5
  Top Layer w20: S1.OP 2530,3010 L2.1
NetL3_1: L3.1 S1.OM | length 307.4
  Top Layer w20: L3.1 2225,2795 2310,2880 S1.OM
NetLED1_A: LED1.A R1.1 | length 102.9
  Top Layer w20: R1.1 1522.37,2945 1528.37,2939 1535.83,2939 1556.37,2918.46 1556.37,2912.72 1568.09,2901 1589.17,2901 1595.17,2895 LED1.A
NetOUTA_1: OUTA.1 RA2.2 UA1.6 | length 332
  Top Layer w10: OUTA.1 UA1.6 4515,1295 4530,1280 4530,1185 4492,1147 RA2.2
NetOUTB_1: OUTB.1 RB2.2 UB1.6 | length 330.7
  Top Layer w10: OUTB.1 UB1.6 4515,1680 4520,1675 4520,1558 RB2.2
NetRA1_2: RA1.2 RA2.1 UA1.2 | length 219.9
  Top Layer w10: RA2.1 RA1.2 4590,1147 4590,1245 UA1.2
NetRB1_2: RB1.2 RB2.1 UB1.2 | length 217.8
  Top Layer w10: RB2.1 RB1.2 4592,1628 4590,1630 UB1.2
NetRC1_2: RC1.2 RC2.2 UC2.6 | length 208.8
  Top Layer w10: RC2.2 3213,1231 RC1.2 3228,1270 UC2.6
NetRC2_1: RC2.1 UC2.3 UC2.7 | length 440.1
  Top Layer w10: RC2.1 3348.15,1225 UC2.7 3430,1220 3430,1410 3420,1420 UC2.3
NetRC4_2: RC4.2 UC2.4 | length 120.9
  Top Layer w10: RC4.2 3303,1370 UC2.4
NetRC5_2: RC5.2 UC3.4 | length 108.9
  Top Layer w10: RC5.2 3262,1923 3300,1885 UC3.4
NetRC6_1: RC6.1 UC3.9 | length 140.5
  Top Layer w10: UC3.9 3815,1685 3840,1710 RC6.1
NetRC6_2: RC6.2 RC27.1 UC3.14 | length 300.5
  Top Layer w10: UC3.14 3833,1935 RC27.1 3867,1928 3890,1905 3890,1815 3878,1803 RC6.2
NetRC7_1: RC7.1 UC3.5 UC3.8 | length 459.3
  Top Layer w10: UC3.8 UC3.8@3367,1685 ; UC3.5 3445,1835 3480,1800 3480,1700 3465,1685 UC3.8@3367,1685 ; RC7.1 UC3.8@3367,1685
NetRC7_2: RC7.2 UC3.16 | length 1017.1
  Top Layer w10: RC7.2 3610,1625 v1(3620,1615) ; v1(3740,1630) 3750,1640 3815,1640 3970,1795 3970,2015 3950,2035 UC3.16
  Bottom Layer w10: v1(3620,1615) 3725,1615 v1(3740,1630)
NetRC8_1: RC8.1 UC2.9 | length 590.8
  Top Layer w10: v1(3660,1155) 3675,1170 UC2.9 ; RC8.1 3876,1506 v1(3880,1510)
  Bottom Layer w10: v1(3660,1155) 3880,1375 v1(3880,1510)
NetRC8_2: RC8.2 RC24.1 UC2.14 | length 145.1
  Top Layer w10: UC2.14 3830,1420
  Top Layer w20: RC24.1 3830,1420 RC8.2
NetRC9_1: RC9.1 UC2.8 UC3.3 | length 1154.6
  Top Layer w10: UC2.8 3415,1170 ; UC3.3 3415,1935 3500,1850 3500,1781.67 3653,1628.67 3653,1593 3455,1395 3455,1200 3425,1170 3415,1170 ; RC9.1 3422,1163 3415,1170
NetRC9_2: RC9.2 UC2.16 | length 581
  Top Layer w10: RC9.2 3478,1353 3645,1520 UC2.16
NetRC14_1: RC14.1 RC17.1 | length 112.1
  Top Layer w10: RC17.1 2775,2121.46 RC14.1
NetRC14_2: RC14.2 RC15.2 RC15.3 UC5.2 | length 467.2
  Top Layer w10: RC15.3 2645,2035 2698,1982 RC14.2@2767,1982 ; RC15.2 2690.28,1905.28 RC14.2@2767,1982 ; UC5.2 2782,1975 RC14.2 RC14.2@2767,1982
NetRC16_2: RC16.2 UC5.3 | length 143.5
  Top Layer w10: RC16.2 2790,1890 2825,1925 UC5.3
NetRC18_2: RC18.2 RC19.2 RC19.3 UC5.6 | length 874.8
  Top Layer w10: RC18.2 3025,1838 3025,1925 UC5.6 3147,1925 3152,1930 3152,1938.89 3183,1969.89 3183,2067.54 3226,2110.54 3226,2123 3229,2126 3232.38,2126 3260,2153.62 3260,2282.01 3225.28,2316.73 RC19.3@3225.28,2487.99
NetRC19_1: RC19.1 RC23.1 UC5.7 | length 435.6
  Top Layer w10: RC23.1 3124.46,2282 RC19.1 3165,2241.46 3165,2000 3140,1975 UC5.7
NetRC20_2: RC20.2 RC21.1 | length 381
  Top Layer w20: RC21.1 3609.72,2254.72 3665,2310 3740,2310 3780,2270 3780,2152 RC20.2
NetRC21_2: RC21.2 RC22.1 | length 79
  Top Layer w20: RC21.2 3735,2212.01 3735,2192 RC22.1
NetRC21_3: RC21.3 UC5.5 | length 1004.8
  Top Layer w10: UC5.5 3155,1875 3170,1890 3170,1931.44 3201,1962.44 3201,2000.34 3289.16,2088.5 3464.83,2088.5 3466.33,2087 3497,2087 3545,2135 3545,2385 3623.27,2463.27 RC21.3
NetRC24_2: RC24.2 UC2.13 | length 98.9
  Top Layer w20: UC2.13 3780,1370 3818,1332 RC24.2
NetRC25_1: RC25.1 RC26.2 UC3.6 | length 653.1
  Top Layer w10: RC26.2 3288,1785 UC3.6 3415,1785 v2(3420,1790) ; RC25.1 3389.72,2150.28 v2(3410,2130)
  Bottom Layer w10: v2(3410,2130) 3427,2113 3427,2029.67 3463,1993.67 3463,1966.33 3420,1923.33 v2(3420,1790)
NetRC27_2: RC27.2 UC3.13 | length 98.5
  Top Layer w10: UC3.13 3827,1885 RC27.2
NetRD1_2: RD1.2 RD2.2 UD2.6 | length 226.8
  Top Layer w10: RD2.2 1848,1206 RD1.2 1858,1270 UD2.6
NetRD2_1: RD2.1 UD2.3 UD2.7 | length 461.6
  Top Layer w10: RD2.1 1918,1220 UD2.7 2060,1220 2090,1250 2090,1415 2085,1420 UD2.3
NetRD4_2: RD4.2 UD2.4 | length 94.3
  Top Layer w10: RD4.2 1928,1370 UD2.4
NetRD5_2: RD5.2 UD3.4 | length 137.7
  Top Layer w10: RD5.2 1950,1913 1950,1885 1960,1875 UD3.4
NetRD6_1: RD6.1 UD3.9 | length 148.4
  Top Layer w10: UD3.9 2465,1675 2485,1695 RD6.1
NetRD6_2: RD6.2 RD27.1 UD3.14 | length 212.6
  Top Layer w10: UD3.14 2478,1925 RD27.1 2514,1889 2514,1837.62 2489.38,1813 RD6.2
NetRD7_1: RD7.1 UD3.5 UD3.8 | length 562.4
  Top Layer w10: UD3.8 2088.33,1675 2148.33,1615 2195,1661.67 2195,1810 2180,1825 UD3.5
NetRD7_2: RD7.2 UD3.16 | length 813.4
  Top Layer w10: RD7.2 2470,1615 2532,1677 2532,2004.67 2508.67,2028 2409.85,2028 UD3.16
NetRD8_1: RD8.1 UD2.9 | length 64.9
  Top Layer w10: RD8.1 2401.85,1138.85 UD2.9
NetRD8_2: RD8.2 RD24.1 UD2.14 | length 526.6
  Top Layer w10: RD8.2 2340,1133 2340,1269.54 2327.54,1282 2306.33,1282 2287,1301.33 2287,1362 2345,1420 UD2.14 2447,1420 RD24.1
NetRD9_1: RD9.1 UD2.8 UD3.3 | length 1162.6
  Top Layer w10: UD2.8 UD2.8@2012,1170 ; UD3.3 2190,1925 2240,1875 v2(2240,1670) ; RD9.1 UD2.8@2012,1170 ; v2(2115,1535) 2115,1215 2070,1170 UD2.8@2012,1170
  Bottom Layer w10: v2(2115,1535) 2240,1660 v2(2240,1670)
NetRD9_2: RD9.2 UD2.16 | length 577.2
  Top Layer w10: RD9.2 2175,1167 2175,1390 2305,1520 UD2.16
NetRD14_1: RD14.1 RD17.1 | length 88.3
  Top Layer w10: RD17.1 1460,2111.46 RD14.1
NetRD14_2: RD14.2 RD15.2 RD15.3 UD5.2 | length 480.5
  Top Layer w10: RD15.3 1360.28,2032.99 1360.28,2017 ; 1355,2015 1357,2017 1360.28,2017 ; RD15.2 1360.28,2017 ; UD5.2 1502,1975 RD14.2 1360.28,2017
NetRD16_2: RD16.2 UD5.3 | length 117.8
  Top Layer w10: RD16.2 1467,1925 UD5.3
NetRD18_2: RD18.2 RD19.2 RD19.3 UD5.6 | length 881.8
  Top Layer w10: v1(1705,1925) UD5.6 ; RD18.2 v1@1760,2105 ; v1(1760,2110) v1@1760,2105 ; RD19.3 1810,2452.01 1863,2399.01 1863,2188 1780,2105 v1@1760,2105
  Bottom Layer w10: v1(1705,1925) 1705,1933.33 1743,1971.33 1743,1998.67 1728,2013.67 1728,2078 v1(1760,2110)
NetRD19_1: RD19.1 RD23.1 UD5.7 | length 516.9
  Top Layer w10: v1(1710,1985) 1720,1975 UD5.7 ; RD23.1 v1@1713,2210 ; v1(1715,2210) v1@1713,2210 ; RD19.1 1746.74,2343.74 1713,2310 v1@1713,2210
  Bottom Layer w10: v1(1710,1985) 1710,2205 v1(1715,2210)
NetRD20_2: RD20.2 RD21.1 | length 105.2
  Top Layer w10: RD21.1 2032.99,2120 RD20.2
NetRD21_2: RD21.2 RD22.1 | length 111.6
  Top Layer w10: RD21.2 2026.72,2250.28 RD22.1
NetRD21_3: RD21.3 UD5.5 | length 480.8
  Top Layer w10: RD21.3 v1(1830,2205) ; UD5.5 1830,1875 1855,1900 1855,2025 v1(1885,2055)
  Bottom Layer w10: v1(1830,2205) 1885,2150 v1(1885,2055)
NetRD24_2: RD24.2 UD2.13 | length 96.4
  Top Layer w10: UD2.13 2453,1370 RD24.2
NetRD25_1: RD25.1 RD26.2 UD3.6 | length 860.2
  Top Layer w10: RD26.2 UD3.6 2110,1775 v2(2145,1740) ; v2(2245,2275) 2288.54,2275 RD25.1
  Bottom Layer w10: v2(2145,1740) 2145,1759.54 2168,1782.54 2168,1963 2200,1995 2200,2230 v2(2245,2275)
NetRD27_2: RD27.2 UD3.13 | length 83.5
  Top Layer w10: UD3.13 2472,1875 RD27.2
NetSCK_1: SCK.1 U8.7 | length 914.3
  Top Layer w10: U8.7 2770,3073 2830.32,3073 2853.32,3096 3091.68,3096 3093.17,3094.51 3094.66,3096 3499,3096 SCK.1
NetSDO_1: SDO.1 U8.6 | length 911.9
  Top Layer w10: U8.6 2820,3055 2837.78,3055 2860.78,3078 3084.22,3078 3085.71,3076.51 3100.63,3076.51 3102.12,3078 3382,3078 3585,2875 SDO.1
NetU8_2: U8.2 UC6.7 UD6.7 | length 1859.1
  Top Layer w10: UD6.7 1445,2600 1455.02,2589.98 1566.68,2589.98 1588.5,2611.8 1588.5,2618.5 1595.17,2625.17 2670.17,2625.17 2690,2645 2690,2864.9 2702.12,2877.02 2712.93,2877.02 2720.91,2885 2770,2885 U8.2 UC6.7
NetU8_3: U8.3 UC6.6 UD6.6 | length 1844.2
  Top Layer w10: UD6.6 1490,2662.99 1490,2615 1523.76,2615 1530.78,2607.98 1559.22,2607.98 1570.5,2619.26 1570.5,2625.96 1594.54,2649.99 2646.99,2649.99 2672,2675 2672,2872.36 2694.66,2895.02 2705.47,2895.02 2713.46,2903 2777.46,2903 2795.46,2885 2820,2885 U8.3 UC6.6
NetU8_5: U8.5 U9.4 V0.1 | length 717.2
  Top Layer w10: U8.5 2875,3017.99 U9.4 2970,2963 2977.46,2963 3027.46,2913 3152.46,2913 3156,2909.46 3208.95,2856.51 3208.95,2687.03 V0.1
NetU8_8: U8.8 U9.1 Vdd.1 | length 1895.3
  Top Layer w10: U8.8 2720,2945 2970,2945 3020,2895 3121.74,2895 3187.79,2828.95 3187.79,2585.95 3233.74,2540 3425,2540 3477,2592 3477,2603.67 3480,2606.67 3480,2935 3400,3015 3265,3015 3122.99,3015 U9.1
NetU9_6: U9.6 UD6.5 | length 1759.3
  Top Layer w10: UD6.5 2617.99,2667.99 2650,2700 2650,2875.81 2687.2,2913.02 2698.02,2913.02 2710,2925 2964.54,2925 3012.54,2877 3020,2877 U9.6
NetU9_7: U9.7 UC6.5 | length 316.8
  Top Layer w10: UC6.5 2879,2686.99 2879,2721.12 2908.88,2751 2951.12,2751 2952.12,2750 3060,2750 3070,2760 U9.7
pads on no net: M1.1 M2.1 M3.1 M4.1 RC25.2 RD25.2 U7.4 U7.5 UA1.1 UA1.5 UB1.1 UB1.5 UC1.1 UC1.5 UC2.1 UC3.1 UC4.1 UC4.5 UD1.1 UD1.5 UD2.1 UD3.1 UD4.1 UD4.5

## Polygon pours and split planes (outlines as drawn)
NetCA1_1 on Bottom Layer "GND" (solid, pour order 2): 4305,1070 4880,1070 4880,1845 4305,1845
GND on Bottom Layer "GND" (solid, pour order 0): 1025,2885 1275,2885 1275,3125 3805,3125 3805,2900 4050,2900 4050,1255 3805,1255 3805,1025.66 1275,1025.66 1275,1275 1025,1275.66
GUARD2 on Top Layer "GA" (solid, pour order 6): 4715,1735 4855,1735 4855,1670 4855,1610 4715,1610
GUARD1 on Top Layer "GA" (solid, pour order 4): 4720,1345 4860,1345 4860,1220 4855,1215 4720,1215

## Other copper
Top Layer:
  text "B-Seite" at 4010,2320 h39.37 r90
  text "BS" at 4345,1080 h39.37 r90
Bottom Layer:
  text "L-Seite" at 4010,2570 h39.37 r90
  text "LS" at 4350,1160 h39.37 r90

## Silkscreen, mask and mechanical layers (free items; w line width, h text height)
Mechanical 3:
  lines w1: 1000,1000 1000,3150 4075,3150 4075,1000 1000,1000 ; 4275,1050 4275,1875 4900,1875 4900,1050 4275,1050